# EAGLE board boardv1 (EAGLE 7.4.0)
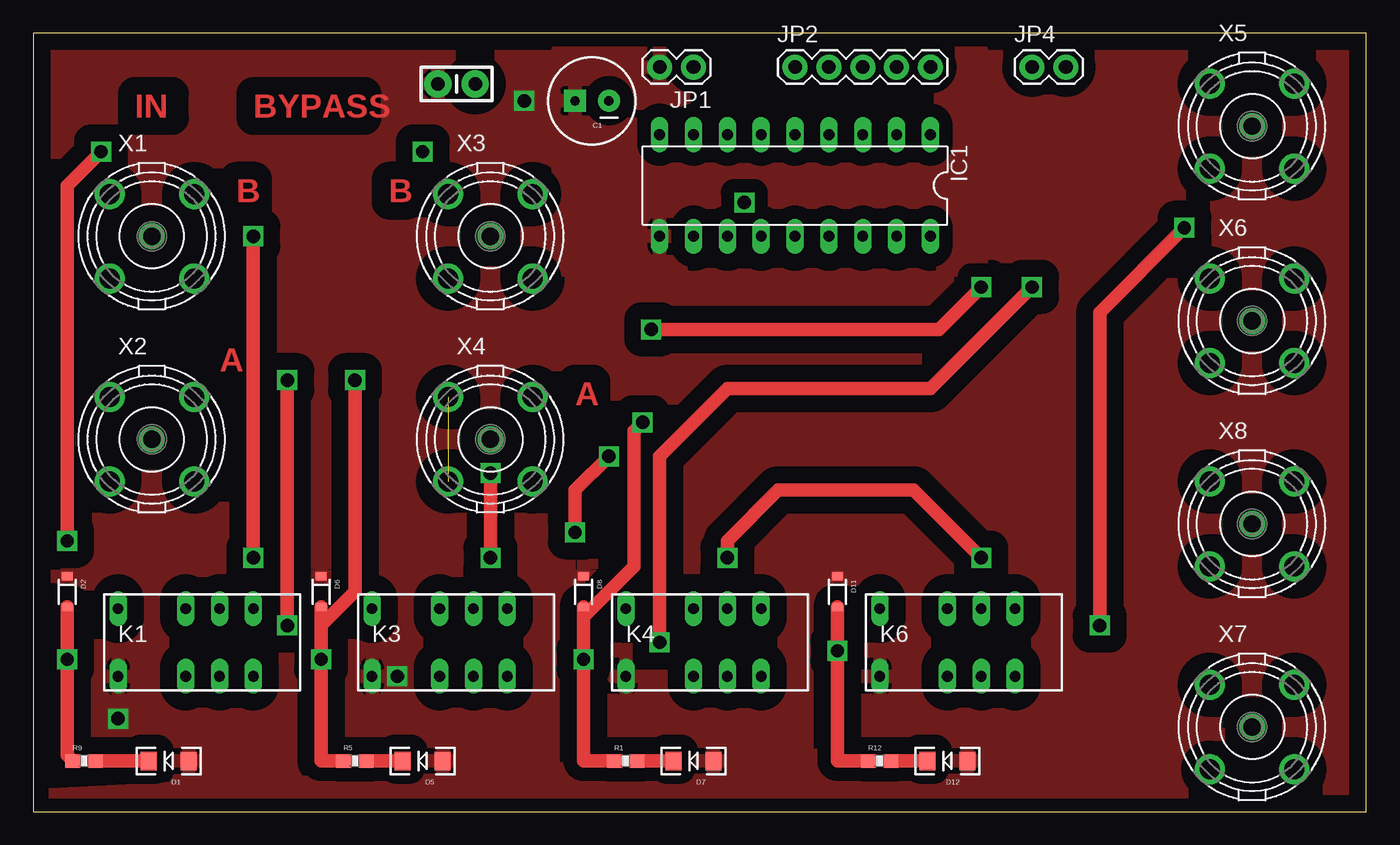
[diagram p0: board, top side]
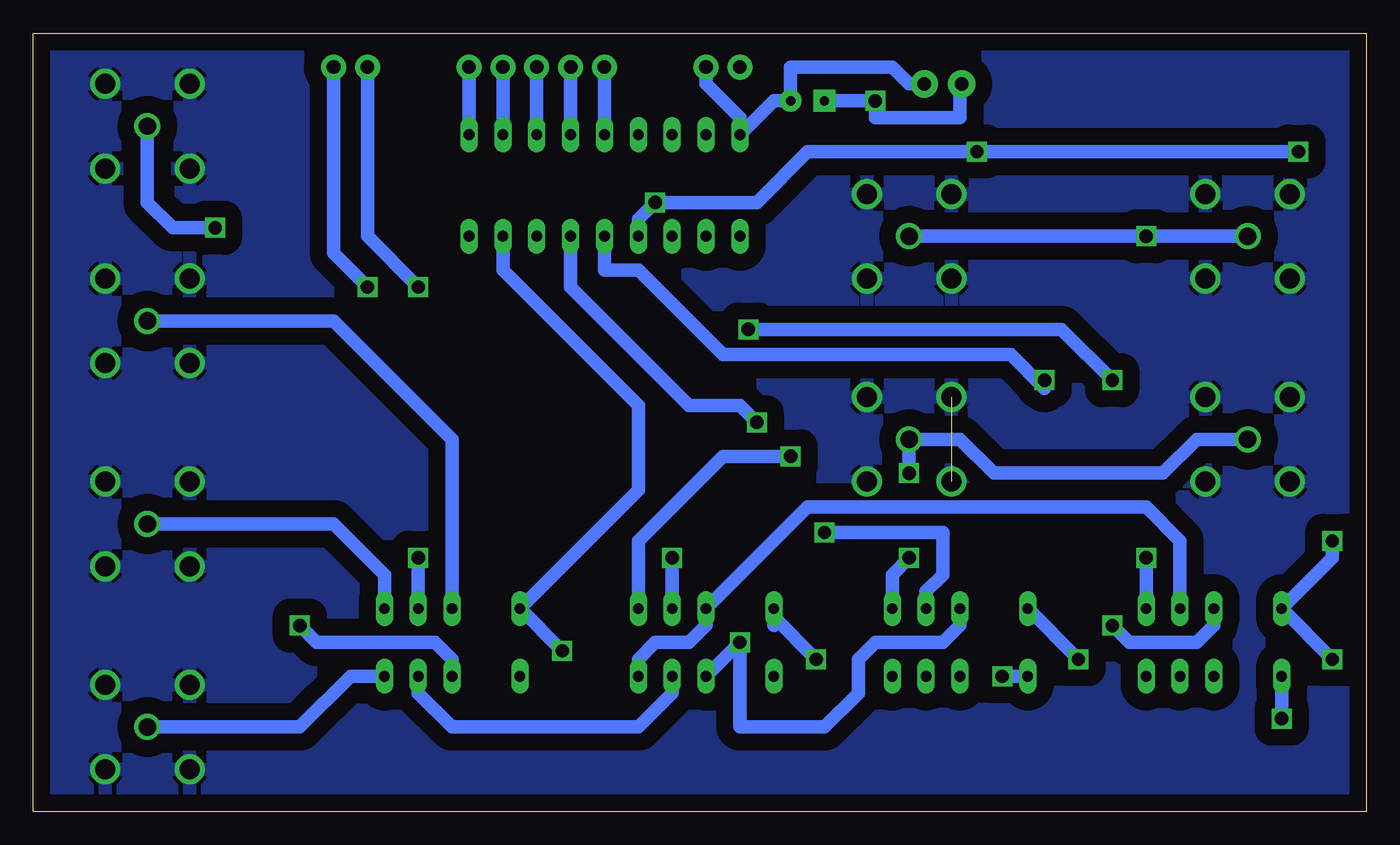
[diagram p1: board, bottom side, seen from below]

Size 100 x 58.41 mm. Coordinates in mm from the lower left corner, seen from the top.
Outline: 0,0 100,0 100,58.41 0,58.41 0,0
Copper layers (1*16): Top 0.035mm / dielectric 1.5mm / Bottom 0.035mm
Design rules "default": minimum track width 10mil, minimum drill 24mil, track to track 8mil, track to pad 8mil, pad to pad 8mil, via to via 8mil, smd to smd 8mil, copper to edge 40mil, drill to drill 8mil, minimum pad ring 10mil, minimum via ring 8mil, stop-mask expansion 4mil, vias tented up to drill 0mil, thermal gap 10mil

## Footprints (pad centres in the part's own frame; a part is rotated, then mirrored left to right if it is on the bottom)
CPOL-RADIAL-100UF-25V = drill 0.7 pad 1.651 square: 1 1.27,0 | drill 0.7 pad 1.651: 2 -1.27,0
CAP-PTH-SMALL-KIT = drill 1.016 pad 2.032: 1 -1.397,0; 2 1.397,0
LED-1206 = smd 1.2 x 1.4: A -1.5,0; C 1.5,0
SOD-323 = smd 0.63 x 0.83: A 1.15,0; C -1.15,0
DIL18 = drill 0.813 long: 1 -10.16,-3.81; 2 -7.62,-3.81; 3 -5.08,-3.81; 4 -2.54,-3.81; 5 0,-3.81; 6 2.54,-3.81; 7 5.08,-3.81; 8 7.62,-3.81; 9 10.16,-3.81; 10 10.16,3.81; 11 7.62,3.81; 12 5.08,3.81; 13 2.54,3.81; 14 0,3.81; 15 -2.54,3.81; 16 -5.08,3.81; 17 -7.62,3.81; 18 -10.16,3.81
1X02 = drill 1.016 pad 1.88: 1 0,0; 2 2.54,0
1X05 = drill 1.016 pad 1.88: 1 0,0; 2 2.54,0; 3 5.08,0; 4 7.62,0; 5 10.16,0
NA = drill 0.8 long: 1 -6.35,-2.54; 3 -1.27,-2.54; 4 1.27,-2.54; 5 3.81,-2.54; 8 3.81,2.54; 9 1.27,2.54; 10 -1.27,2.54; 12 -6.35,2.54
0603-RES = smd 1.1 x 1: 1 -0.85,0; 2 0.85,0
112404 = drill 1.3: 1 0,0 | drill 1.5: 2 -3.175,3.175; 3 3.175,3.175; 4 3.175,-3.175; 5 -3.175,-3.175

## Placement (x,y rotation side)
C1  [CPOL-RADIAL-100UF-25V]  41.91,53.34 180 top
C2  0.1uF  [CAP-PTH-SMALL-KIT]  31.75,54.61 0 top
D1  RED  [LED-1206]  10.16,3.81 180 top
D2  250mA/100V  [SOD-323]  2.54,16.51 270 top
D5  RED  [LED-1206]  29.21,3.81 180 top
D6  250mA/100V  [SOD-323]  21.59,16.51 270 top
D7  RED  [LED-1206]  49.53,3.81 180 top
D8  250mA/100V  [SOD-323]  41.27,16.51 270 top
D11  250mA/100V  [SOD-323]  60.33,16.51 270 top
D12  RED  [LED-1206]  68.58,3.81 180 top
IC1  [DIL18]  57.15,46.99 180 top
JP1  [1X02]  49.53,55.88 180 top
JP2  [1X05]  57.15,55.88 0 top
JP4  [1X02]  74.93,55.88 0 top
K1  NA  [NA]  12.7,12.7 0 top
K3  NA  [NA]  31.75,12.7 0 top
K4  NA  [NA]  50.8,12.7 0 top
K6  NA  [NA]  69.85,12.7 0 top
R1  82  [0603-RES]  44.45,3.81 0 top
R5  82  [0603-RES]  24.13,3.81 0 top
R9  82  [0603-RES]  3.81,3.81 0 top
R12  82  [0603-RES]  63.5,3.81 0 top
X1  112404  [112404]  8.89,43.18 0 top
X2  112404  [112404]  8.89,27.94 0 top
X3  112404  [112404]  34.29,43.18 0 top
X4  112404  [112404]  34.29,27.94 0 top
X5  112404  [112404]  91.44,51.44 0 top
X6  112404  [112404]  91.44,36.83 0 top
X7  112404  [112404]  91.44,6.35 0 top
X8  112404  [112404]  91.44,21.59 0 top

## Library data of the parts
C1 = SparkFun-Capacitors; PROD_ID: CAP-08439
C2 = SparkFun-Capacitors; PROD_ID: CAP-08370
D1 D5 D7 D12 = SparkFun-LED; PROD_ID: DIO-09912
D2 D6 D8 D11 = SparkFun-DiscreteSemi; PROD_ID: DIO-09646
IC1 = uln-udn
JP1 JP2 JP4 = SparkFun-Connectors
K1 K3 K4 K6 = relay; OC_FARNELL: unknown; OC_NEWARK: unknown
R1 R5 R9 R12 = SparkFun-Resistors; PROD_ID: RES-12311
X1-X8 = amphenol-112404_10; MF: Amphenol Connex; MPN: 112404; OC_FARNELL: 1583381; OC_NEWARK: 99H4363

## Nets
ANALOG: K4.9 K6.9
ARDUINO1: JP4.2 K3.10 K4.3
DIGITAL: K4.4 K6.4
GND: X1.2 X1.3 X1.4 X1.5 X2.2 X2.3 X2.4 X2.5 X3.2 X3.3 X3.4 X3.5 X4.2 X4.3 X4.4 X4.5 X5.2 X5.3 X5.4 X5.5 X6.2 X6.3 X6.4 X6.5 X7.2 X7.3 X7.4 X7.5 X8.2 X8.3 X8.4 X8.5
GND2: C1.2 C2.2 IC1.9 JP1.1
N$1: JP4.1 K1.10
N$3: D1.C R9.2
N$4: D12.C R12.2
N$5: D5.C R5.2
N$7: D7.C R1.2
N$21: IC1.1 JP2.5
N$22: IC1.2 JP2.4
N$23: IC1.3 JP2.3
N$24: IC1.4 JP2.2
N$25: IC1.5 JP2.1
O1: K1.9 K4.5 K4.10
O2: K3.8 X2.1 X4.1
OUTPUT1: K6.3 X5.1
OUTPUT2: K6.10 X6.1
OUTPUT4: K6.8 X8.1
OUTPUTA: K1.8 X1.1 X3.1
R1: IC1.18
R2: D11.A IC1.17 K6.12 R12.1
R3: IC1.16
R4: D8.A IC1.15 K4.12 R1.1
R5: D6.A IC1.14 K3.12 R5.1
R6: D2.A IC1.13 K1.12 R9.1
SIG3B: K3.9 K4.8
SIG4A: K6.5 X7.1
VCC: C1.1 C2.1 D1.A D2.C D5.A D6.C D7.A D8.C D11.C D12.A IC1.10 JP1.2 K1.1 K3.1 K4.1 K6.1

## Tracks (layer width: path | path; a pad name or v marks a point on that pad's centre or on a via)
ANALOG  (via drill 1)
  Top 1.016: v52.07,19.05 52.07,20.32 55.88,24.13 66.04,24.13 v71.12,19.05
  Bottom 1.016: K4.9 v52.07,19.05 | v71.12,19.05 K6.9
ARDUINO1  (via drill 1)
  Top 1.016: v46.99,12.7 46.99,26.67 52.07,31.75 67.31,31.75 v74.93,39.37
  Bottom 1.016: K3.10 30.48,13.97 31.75,12.7 36.83,12.7 38.1,11.43 38.1,8.89 40.64,6.35 46.99,6.35 v46.99,12.7 K4.3 | JP4.2 77.47,41.91 v74.93,39.37
DIGITAL
  Bottom 1.016: K4.4 52.07,8.89 54.61,6.35 68.58,6.35 71.12,8.89 K6.4
GND  (1 unrouted)
  pour Bottom (isolate 1.27): 1.27,57.15 1.27,1.27 99.06,1.27 99.06,57.15
GND2
  Bottom 1.016: JP1.1 49.53,54.61 46.99,52.07 IC1.9 44.45,53.34 C1.2 43.18,55.88 35.56,55.88 34.29,54.61 C2.2
N$1  (via drill 1)
  Top 1.016: v19.05,13.97 v19.05,32.38 | v46.35,36.2 67.94,36.2 v71.12,39.37
  Bottom 1.016: K1.10 11.43,13.97 12.7,12.7 17.78,12.7 v19.05,13.97 | JP4.1 74.93,43.18 v71.12,39.37 | v46.35,36.2 22.86,36.2 v19.05,32.38
N$3
  Top 1.016: R9.2 D1.C
N$4
  Top 1.016: R12.2 D12.C
N$5
  Top 1.016: R5.2 D5.C
N$7
  Top 1.016: R1.2 D7.C
N$21
  Bottom 1.016: JP2.5 IC1.1
N$22
  Bottom 1.016: IC1.2 JP2.4
N$23
  Bottom 1.016: JP2.3 IC1.3
N$24
  Bottom 1.016: IC1.4 JP2.2
N$25
  Bottom 1.016: JP2.1 IC1.5
O1
  Bottom 1.016: K1.9 13.97,20.32 16.51,22.86 41.91,22.86 K4.10 49.53,13.97 50.8,12.7 53.34,12.7 54.61,11.43 K4.5
O2  (via drill 1)
  Top 1.016: v34.29,19.05 v34.29,25.4
  Bottom 1.016: K3.8 35.56,17.78 v34.29,19.05 | v34.29,25.4 X4.1 30.48,27.94 27.94,25.4 15.24,25.4 12.7,27.94 X2.1
OUTPUT1  (via drill 1)
  Top 1.016: v80.01,13.97 80.01,37.47 v86.36,43.81
  Bottom 1.016: K6.3 68.58,11.43 69.85,12.7 78.74,12.7 v80.01,13.97 | v86.36,43.81 89.53,43.81 91.44,45.72 X5.1
OUTPUT2
  Bottom 1.016: K6.10 68.58,27.94 77.47,36.83 X6.1
OUTPUT4
  Bottom 1.016: K6.8 73.66,17.78 77.47,21.59 X8.1
OUTPUTA  (via drill 1)
  Top 1.016: v16.51,19.05 v16.51,43.18
  Bottom 1.016: X1.1 v16.51,43.18 X3.1 | K1.8 v16.51,19.05
R2  (via drill 1)
  Top 1.016: D11.A v60.33,12.06 60.33,3.81 R12.1
  Bottom 1.016: v60.33,12.06 K6.12 54.61,24.13 54.61,30.48 64.77,40.64 IC1.17
R4  (via drill 1)
  Top 1.016: 43.18,3.81 R1.1 41.27,3.81 v41.27,11.43 41.27,14.61 | D8.A 41.27,14.61 | v45.72,29.21 45.09,28.57 45.09,18.41 41.27,14.61
  Bottom 1.016: 44.45,13.97 K4.12 44.45,14.61 v41.27,11.43 | IC1.15 59.69,39.37 50.8,30.48 46.99,30.48 v45.72,29.21
R5  (via drill 1)
  Top 1.016: D6.A 21.59,13.97 | 21.59,13.97 v21.59,11.43 21.59,3.81 R5.1 | 21.59,13.97 24.13,16.51 v24.13,32.38
  Bottom 1.016: K3.12 v21.59,11.43 | v24.13,32.38 24.13,31.75 26.67,34.29 48.26,34.29 54.61,40.64 57.15,40.64 IC1.14
R6  (via drill 1)
  Top 1.016: v2.54,11.43 D2.A 2.54,4.23 R9.1 | v2.54,20.32 2.54,46.99 v5.08,49.53
  Bottom 1.016: v2.54,20.32 2.54,19.05 K1.12 v2.54,11.43 | IC1.13 54.61,44.45 v53.34,45.72 45.72,45.72 41.91,49.53 v29.21,49.53 v5.08,49.53
SIG3B  (via drill 1)
  Top 1.016: v40.64,20.95 40.64,24.13 v43.18,26.67
  Bottom 1.016: K3.9 33.02,16.51 31.75,17.78 31.75,20.95 v40.64,20.95 | v43.18,26.67 48.26,26.67 54.61,20.32 K4.8
SIG4A
  Bottom 1.016: K6.5 76.2,10.16 80.01,6.35 X7.1
VCC  (via drill 1)
  Bottom 1.016: K1.1 v6.35,6.99 | K3.1 v27.3,10.16 | C1.1 v36.83,53.34 36.83,52.07 30.48,52.07 30.48,54.61
  pour Top (isolate 1.27): 99.06,57.15 1.27,57.15 1.27,0 99.06,0
  pour Top (isolate 1.016): 99.06,6.35 99.06,5.08 99.06,1.27 1.27,1.27
  pour Top (isolate 1.016): 39.37,57.15 39.37,40.64 71.12,40.64 71.12,57.15

## Text on the board
Top: IN | BYPASS | B | B | A | A